# Altium PCB WallMote Revision 3.pcbdoc
Units mil, origin at the board's own origin, x right, y up, seen from the top; angles counter-clockwise.
Board outline 5345 x 3965.6 mil, 2 copper layers (Top Layer, Bottom Layer); 46 components, 81 nets, 202 pads, 35 vias.
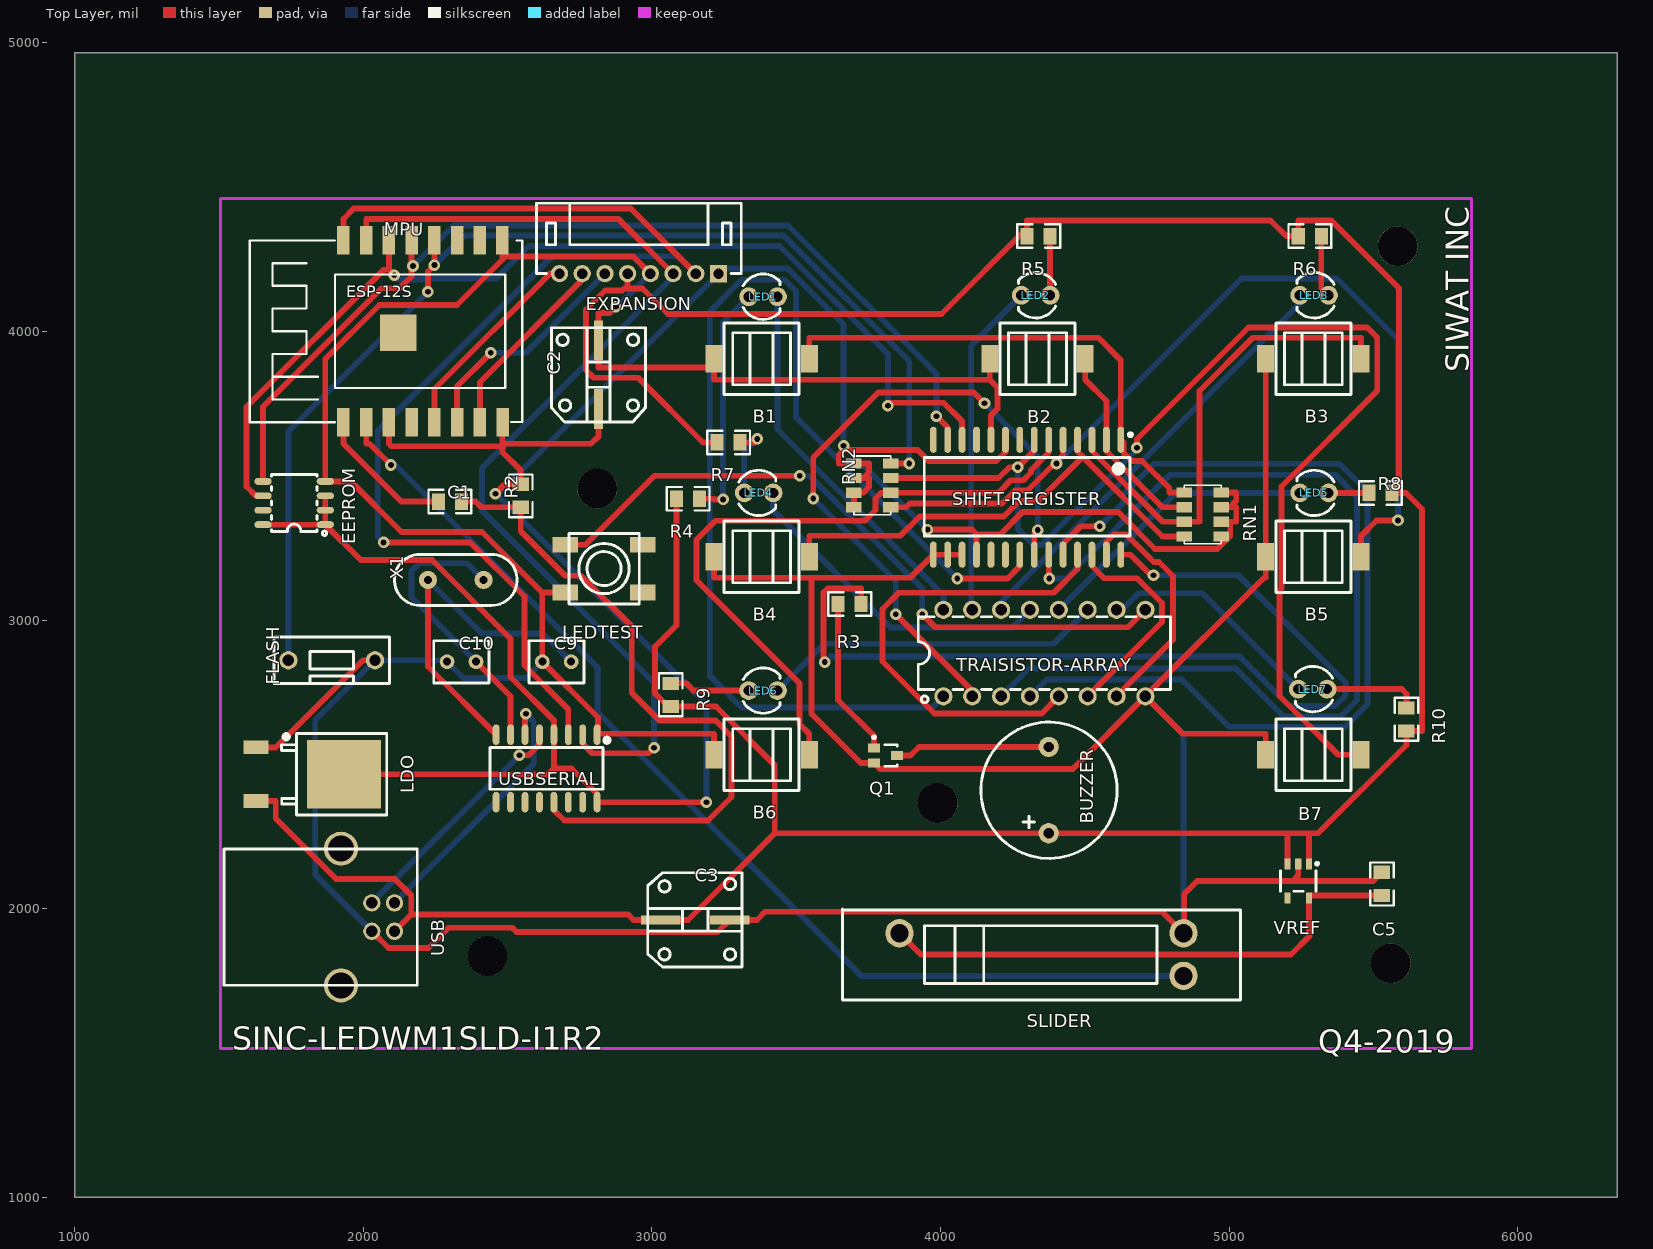
[diagram p0: Top Layer view]
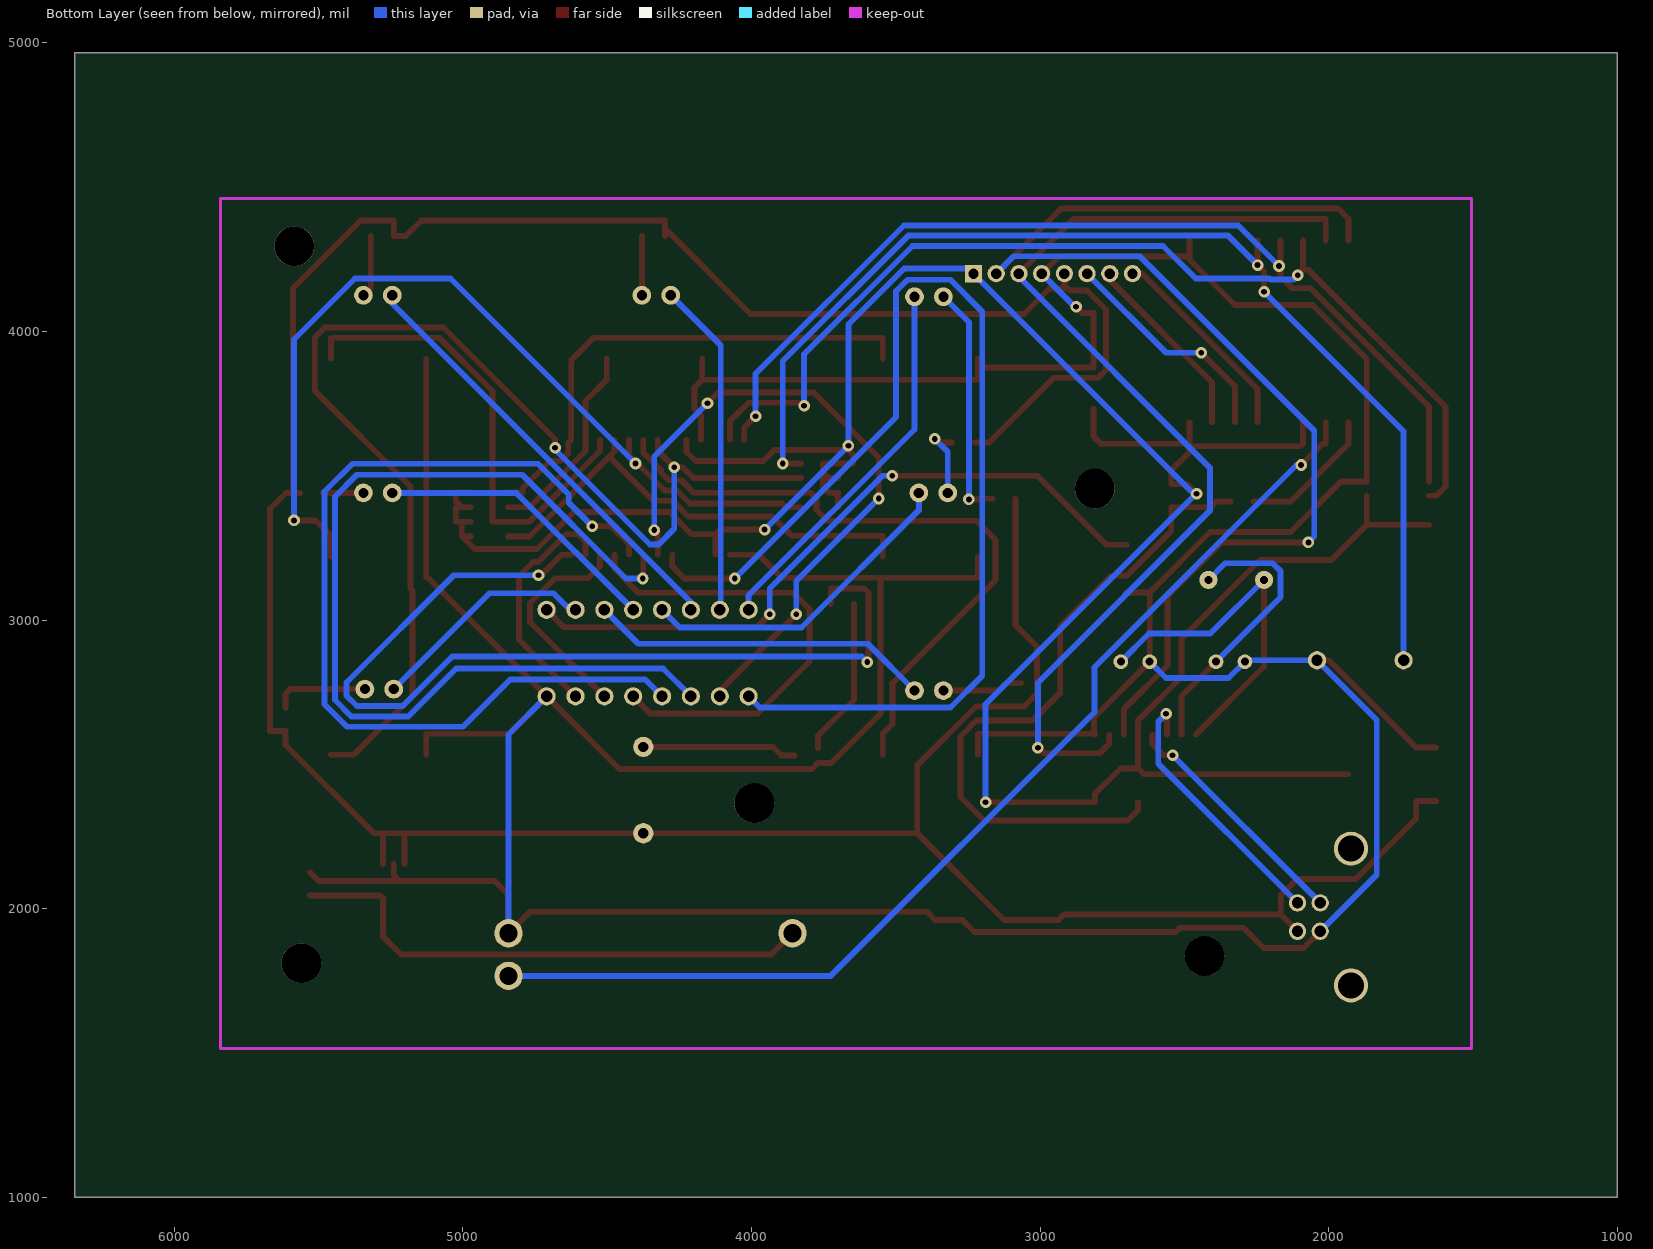
[diagram p1: Bottom Layer view, seen from below]

## Layer stack, top to bottom
Top Layer: signal copper (thickness not stored)
Dielectric: dielectric 12.6, FR-4, Dk 4.8
Bottom Layer: signal copper (thickness not stored)

## Board outline
6345,1000 1000,1000 1000,4965.6 6345,4965.6

## Components (designator, comment, footprint, x,y, rotation, side; value= is the part's Value field where it differs from the comment)
B1 "SKPGABE010" SW-SMD-6.6X6.3X5 3380,3905.6 r0 top
B2 "SKPGABE010" SW-SMD-6.6X6.3X5 4336.25,3905.6 r0 top
B3 "SKPGABE010" SW-SMD-6.6X6.3X5 5292.5,3905.6 r0 top
B4 "SKPGABE010" SW-SMD-6.6X6.3X5 3380,3219.35 r0 top
B5 "SKPGABE010" SW-SMD-6.6X6.3X5 5292.5,3219.35 r0 top
B6 "SKPGABE010" SW-SMD-6.6X6.3X5 3380,2533.1 r0 top
B7 "SKPGABE010" SW-SMD-6.6X6.3X5 5292.5,2533.1 r0 top
BUZZER "TMB12A12" B-12*7.5 4375,2410.6 r90 top
C1 "100nF" 0805 2300,3410.6 r0 top
C2 "10uF" CAP-T-8*7 2815,3850.6 r90 top
C3 "10uF" CAP-T-8*7 3150,1960.6 r0 top
C5 "1uF" 0805 5530,2085.6 r90 top
C9 "22pF" CAP-CT4G-0805-2.54MM 2670,2855.6 r0 top
C10 "22pF" CAP-CT4G-0805-2.54MM 2340,2855.6 r0 top
EEPROM "24LC256T-I/SN SOP-8" SOIC-8_L4.9-W3.9-P1.27-LS6.0-BL 1760,3405.6 r90 top
EXPANSION "X2016WR-08B-N0SN" CONN-TH_8PIN-H-MALE-PITCH2.00-L_X2016WR-08B-N0SN 2955.05,4200.6 r180 top
FLASH "DS-01RP_C319063" DS-01RP 1890,2860.6 r90 top
LDO "LD1117DT33CTR" TO-252-2 1780,2465.6 r270 top
LED1 "TJ-L3FYWGHRMFCSFLC2R-A5" LED-3MM/2.54 3385,4120.6 r90 top
LED2 "TJ-L3FYWGHRMFCSFLC2R-A5" LED-3MM/2.54 4330,4125.6 r270 top
LED3 "TJ-L3FYWGHRMFCSFLC2R-A5" LED-3MM/2.54 5295,4125.6 r270 top
LED4 "TJ-L3FYWGHRMFCSFLC2R-A5" LED-3MM/2.54 3370,3440.6 r90 top
LED5 "TJ-L3FYWGHRMFCSFLC2R-A5" LED-3MM/2.54 5295,3440.6 r270 top
LED6 "TJ-L3FYWGHRMFCSFLC2R-A5" LED-3MM/2.54 3385,2755.6 r90 top
LED7 "TJ-L3FYWGHRMFCSFLC2R-A5" LED-3MM/2.54 5290,2760.6 r270 top
LEDTEST "SKHUBHE010" SW-SMD-6.2X6.3X3.1-4P 2833.86,3178.28 r0 top
MPU "ESP-12S" ESP-12S 2206.49,4000.64 r0 top
Q1 "PMST5551,115" SOT-323-3_L2.2-W1.3-P1.30-LS2.1-BL 3810,2530.6 r180 top
R2 "10K" 0805 2545,3430.6 r90 top
R3 "1K" 0805 3685,3055.6 r180 top
R4 "150" 0805 3125,3420.6 r180 top
R5 "150" 0805 4340,4330.6 r180 top
R6 "150" 0805 5280,4330.6 r180 top
R7 "150" 0805 3265,3615.6 r180 top
R8 "150" 0805 5525,3440.6 r0 top
R9 "150" 0805 3065,2740.6 r270 top
R10 "150" 0805 5615,2655.6 r270 top
RN1 "10K" 1206_X4 4908.9,3365.9 r270 top
RN2 "10K" 1206_X4 3763.9,3466.7 r90 top
SHIFT-REGISTER "MCP23017-E/SO" SOIC-28_300MIL 4300,3425.6 r270 top
SLIDER "ALPS" RES-ADJ-TH_3PIN-V-L35.00-W8.00 4350.03,1840.62 r180 top
TRAISISTOR-ARRAY "ULN2003AIN" PDIP-16_L22.1-W6.3-P2.54-LS7.6-BL 4360,2885.6 r0 top
USB "670688000" USB-B-4P-DIP-12.0X17.0-H11.0-MOLEX 2014.99,1970.58 r270 top
USBSERIAL "CH340G" SOIC-16_150MIL 2635,2485.6 r180 top
VREF "TLV71210DBVR" SOT-23-5_L3.0-W1.7-P0.95-LS2.8-BL 5240,2095.6 r180 top
X1 "12MHz" OSC-49S-1 2320,3139.14 r90 top

## Footprints (in the part's own frame and the unit in brackets; to place one, negate y for a bottom-side part, rotate by r counter-clockwise, add the part's x,y. Pads: shape width x height; smd on the part's side, far side on the other; paste and mask are expansions set on the pad)
0805 [mm]
  rect 1.16x1.45 smd: 1(-1.016,0) 2(1.016,0)
  silkscreen extent -1.9,-1.03 1.87,1.04
1206_X4 [mm]
  rect 0.9x1.375 smd: 1(-1.933,-1.623) 2(-0.643,-1.623) 3(0.643,-1.623) 4(1.933,-1.623) 5(1.933,1.623) 6(0.643,1.623) 7(-0.643,1.623) 8(-1.933,1.623)
  silkscreen extent -2.58,-1.62 2.58,1.62
B-12*7.5 [mil]
  round 70 hole 35.4: 1(-149.6,0) 2(149.6,0)
  silkscreen extent -237,-237 236,235
CAP-CT4G-0805-2.54MM [mm]
  round 1.3 hole 0.7: 1(-1.27,0) 2(1.27,0)
  silkscreen extent -2.44,-1.87 2.41,1.84
CAP-T-8*7 [mm]
  rect 3.5x0.8 smd: 1(-3.028,-0.005) 2(3.028,0.005)
  silkscreen extent -4.18,-4.14 4.13,4.16
CONN-TH_8PIN-H-MALE-PITCH2.00-L_X2016WR-08B-N0SN [mil]
  rect 60x60 hole 36: 1(-275.59,0)
  round 60 hole 36: 2(-196.85,0) 3(-118.11,0) 4(-39.37,0) 5(39.37,0) 6(118.11,0) 7(196.85,0) 8(275.59,0)
  silkscreen extent -354,-244 355,0
DS-01RP [mm]
  round 1.6 hole 1: 1(0,-3.81) 2(0,3.81)
  silkscreen extent -2.03,-5.08 2.03,5.08
ESP-12S [mm]
  rect 1.1x2.5 smd: 1(-7.002,-8.002) 2(-4.991,-8.002) 3(-2.998,-8) 4(-0.989,-8.001) 5(1.006,-8.002) 6(3.002,-8.001) 7(5.006,-8.002) 8(7.002,-8.001) 9(6.996,8) 10(4.998,8) 11(2.998,8.001) 12(0.998,8) 13(-1.004,8.001) 14(-3.004,8.002) 15(-5.002,8) 16(-7.002,8)
  rect 3.2x3.2 smd: 17(-2.176,-0.128)
  silkscreen extent -15.25,-8 8.75,8
LED-3MM/2.54 [mil]
  round 65 hole 35.43: 1(0,50) 2(0,-50)
  silkscreen extent -79,-59 79,69
OSC-49S-1 [mm]
  round 1.6 hole 0.7: 1(0,2.45) 2(0,-2.45)
  silkscreen extent -2.25,-5.39 2.25,5.39
PDIP-16_L22.1-W6.3-P2.54-LS7.6-BL [mm]
  round 1.6 hole 1: 1(-8.89,-3.81) 2(-6.35,-3.81) 3(-3.81,-3.81) 4(-1.27,-3.81) 5(1.27,-3.81) 6(3.81,-3.81) 7(6.35,-3.81) 8(8.89,-3.81) 9(8.89,3.81) 10(6.35,3.81) 11(3.81,3.81) 12(1.27,3.81) 13(-1.27,3.81) 14(-3.81,3.81) 15(-6.35,3.81) 16(-8.89,3.81)
  silkscreen extent -11.1,-4.38 11.1,3.2
RES-ADJ-TH_3PIN-V-L35.00-W8.00 [mm]
  round 2.5 hole 1.6: 1(-12.5,-1.875) 2(-12.5,1.875) 3(12.5,-1.875)
  silkscreen extent -17.53,-4 17.53,4
SOIC-8_L4.9-W3.9-P1.27-LS6.0-BL [mm]
  oval 0.6x1.52 smd: 1(-1.905,-2.74) 2(-0.635,-2.74) 3(0.635,-2.74) 4(1.905,-2.74) 5(1.905,2.74) 6(0.635,2.74) 7(-0.635,2.74) 8(-1.905,2.74)
  silkscreen extent -2.86,-2.86 2.5,2
SOIC-16_150MIL [mm]
  oval 0.6x1.8 smd: 1(-4.445,-2.972) 2(-3.175,-2.972) 3(-1.905,-2.972) 4(-0.635,-2.972) 5(0.635,-2.972) 6(1.905,-2.972) 7(3.175,-2.972) 8(4.445,-2.972) 9(4.445,2.972) 10(3.175,2.972) 11(1.905,2.972) 12(0.635,2.972) 13(-0.635,2.972) 14(-1.905,2.972) 15(-3.175,2.972) 16(-4.445,2.972)
  silkscreen extent -5.51,-2.69 4.98,1.83
SOIC-28_300MIL [mm]
  oval 2.3x0.6 smd: 1(-5.057,8.255) 2(-5.057,6.985) 3(-5.057,5.715) 4(-5.057,4.445) 5(-5.057,3.175) 6(-5.057,1.905) 7(-5.057,0.635) 8(-5.057,-0.635) 9(-5.057,-1.905) 10(-5.057,-3.175) 11(-5.057,-4.445) 12(-5.057,-5.715) 13(-5.057,-6.985) 14(-5.057,-8.255) 15(5.058,-8.255) 16(5.058,-6.985) 17(5.058,-5.715) 18(5.058,-4.445) 19(5.058,-3.175) 20(5.058,-1.905) 21(5.058,-0.635) 22(5.058,0.635) 23(5.058,1.905) 24(5.058,3.175) 25(5.058,4.445) 26(5.058,5.715) 27(5.058,6.985) 28(5.058,8.255)
  silkscreen extent -5.66,-9.05 3.42,9.25
SOT-23-5_L3.0-W1.7-P0.95-LS2.8-BL [mm]
  rect 0.55x1 smd: 1(-0.95,-1.5) 2(0,-1.5) 3(0.95,-1.5) 4(0.95,1.5) 5(-0.95,1.5)
  silkscreen extent -1.78,-1.65 1.55,0.9
SOT-323-3_L2.2-W1.3-P1.30-LS2.1-BL [mil]
  rect 41.5x32.5 smd: 1(40,-26) 2(40,26) 3(-40,0)
  silkscreen extent -40,-68 45,37
SW-SMD-6.2X6.3X3.1-4P [mm]
  rect 2.25x1.4 smd: 1(-3.4,2.1) 2(3.4,2.1) 3(-3.4,-2.1) 4(3.4,-2.1)
  silkscreen extent -3.1,-3.1 3.1,3.1
SW-SMD-6.6X6.3X5 [mm]
  rect 1.5x2.4 smd: 1(-4.2,0) 2(4.2,0)
  silkscreen extent -3.3,-3.15 3.3,3.15
TO-252-2 [mm]
  rect 1.2x2.2 smd: 1(-2.362,-3.876) 3(2.362,-3.871)
  rect 6x6.5 smd: 4(0,3.876)
  silkscreen extent -3.57,-1.61 3.57,7.64
USB-B-4P-DIP-12.0X17.0-H11.0-MOLEX [mm]
  round 1.524 hole 1: 1(1.25,2.355) 2(-1.25,2.355) 3(-1.25,0.355) 4(1.25,0.355)
  round 3 hole 2.3: 5(6.02,-2.355) 6(-6.02,-2.355)
  silkscreen extent -6,-12.64 6,4.35

## Free pads (board coordinates)
  round 137.8 hole 137.8 unplated: ""(2430,1835.6) ""(2810,3455.6) ""(3990,2365.6) ""(5560,1810.6) ""(5585,4295.6)

## Via types
v1: diameter 40.16, hole 20.08, Top Layer to Bottom Layer, 35 vias

## Nets (pads, with @x,y where several pads share a name; then routed paths per layer and width w, separated by ;. In a path a pad name is that pad's centre, name@x,y a point inside that pad or via, vN(x,y) a via of type N, cw(c..) or ccw(c..) an arc to the next point about the centre after c; other vN are vias at no path point)
1V: C5.1 SLIDER.3 VREF.5 | length 1868
  Top Layer w20.08: SLIDER.3 3931.74,1840.6 5215,1840.6 5280,1905.6 5277.4,1908.2 VREF.5 5286.45,2045.6 C5.1
3.3V: C2.1 EEPROM.1 EEPROM.2 EEPROM.3 EEPROM.8 EXPANSION.1 LDO.4 MPU.3 MPU.8 R2.2 RN1.5 RN1.6 RN1.7 RN1.8 RN2.5 RN2.6 RN2.7 RN2.8 SHIFT-REGISTER.9 SHIFT-REGISTER.18 USBSERIAL.4 USBSERIAL.16 | length 10667.2
  Top Layer w20.08: EEPROM.8 EEPROM.1 ; EEPROM.3 EEPROM.2 EEPROM.1 ; LDO.4 2640,2465.6 2660,2485.6 ; MPU.3@2088.5,3685.7 2088.5,3611 2097.3,3602.2 2482.2,3602.2 ; v1(2457.5,3437.9) 2490.2,3470.6 R2.2 2545,3518.9 2482.2,3581.7 2482.2,3602.2 ; MPU.8 2482.2,3611 ; C2.1 2815.2,3637 2789.1,3611 2482.2,3611 ; v1(3188.7,2368.6) USBSERIAL.16 2810,2397.1 2721.5,2485.6 2660,2485.6 ; v1(3664.1,3603.8) 3664.2,3603.6 v1@3664.2,3589 ; RN2.8 3700,3428.3 RN2.7@3713.1,3441.4 ; RN2.7 RN2.7@3713.1,3441.4 ; RN2.6 3713.1,3492 3726.3,3492 3731.8,3492 ; v1(3954.5,3313.4) 4108.9,3313.4 4125,3297.2 ; SHIFT-REGISTER.18 4125,3297.2 ; SHIFT-REGISTER.9 4225,3582.8 4193.6,3551.4 3959.1,3551.4 3921.5,3589 v1@3664.2,3589 ; RN1.5 5002.3,3289.8 ; RN1.6 4999.1,3340.6 5004.6,3340.6 ; RN1.7 5003.1,3391.2 ; RN1.8 5025.3,3442 5025.3,3413.4 5003.1,3391.2 ; EEPROM.1 1990.6,3207.9 2237.3,3207.9 2510,2935.2 2510,2802.6 2660,2652.6 USBSERIAL.4 2660,2485.6 ; 2482.2,3602.2 2482.2,3611 ; v1@3664.2,3589 3647.5,3572.2 3647.5,3542.8 RN2.5 3752.5,3542.8 3752.5,3512.7 3731.8,3492 ; RN2.7@3713.1,3441.4 3726.3,3441.4 3732,3441.4 3752.5,3461.9 3752.5,3492 3731.8,3492 ; 4125,3297.2 4207.6,3297.2 4285.2,3374.9 4615.2,3374.9 4743.5,3246.6 4959.1,3246.6 5002.3,3289.8 ; 5002.3,3289.8 5004.6,3292.1 5004.6,3340.6 ; 5003.1,3391.2 5025.3,3391.2 5025.3,3340.6 5004.6,3340.6
  Bottom Layer w20.08: v1(2457.5,3437.9) 2461.9,3433.6 v1@2463.6,3433.6 ; v1(3188.7,2368.6) 3188.7,2708.4 v1@2463.6,3433.6 ; v1(3954.5,3313.4) v1(3664.1,3603.8) 3664.1,4024.9 3470.3,4218.6 3248.6,4218.6 EXPANSION.1 v1@2463.6,3433.6
5V: BUZZER.1 C3.1 EXPANSION.5 LDO.3 R4.2 R5.2 R6.2 R7.2 R8.2 R9.2 R10.2 USB.1 VREF.1 VREF.3 | length 12000
  Top Layer w20.08: LDO.3 1696.4,2372.6 1696.4,2312.4 1905.9,2102.9 2108.5,2102.9 2165.5,2045.9 2165.5,1979.2 ; USB.1 2165.5,1979.2 ; EXPANSION.5@2915.6,4200.6 2915.6,4149.3 ; R4.2 3085,3393.6 3085,3366.6 3085,2982.1 3011,2908.1 3011,2745.1 3055.5,2700.6 R9.2 3221.7,2700.6 3425.8,2496.6 3425.8,2261 ; R7.2 3176.7,3615.6 2952.4,3839.9 2798,3839.9 2771.2,3866.7 2771.2,4076.4 2837,4142.2 2896.9,4142.2 2903.9,4149.3 2915.6,4149.3 ; R5.2 R5.2@4300,4357.6 ; VREF.3 5202.6,2261 ; VREF.1 5277.4,2261 ; R8.2 5589.2,3440.6 ; 2165.5,1979.2 2917.7,1979.2 2936.4,1960.4 C3.1 3078,1960.4 3125.2,1960.4 3425.8,2261 ; 2915.6,4149.3 2967,4149.3 3055.3,4060.9 4003.3,4060.9 R5.2@4300,4357.6 ; 3425.8,2261 BUZZER.1 5308.7,2261 5615,2567.3 R10.2 5669,2615.6 5669,3384.9 5613.3,3440.6 5589.2,3440.6 ; R5.2@4300,4357.6 4300,4384.6 5144.2,4384.6 5198.3,4330.6 R6.2 5240,4384.6 5354.7,4384.6 5589.2,4150.1 5589.2,3440.6
BTN1: B1.2 RN1.1 SHIFT-REGISTER.1 | length 1786.1
  Top Layer w20.08: B1.2 3545.4,3978.3 4547.2,3978.3 4625,3900.5 SHIFT-REGISTER.1 4635.3,3614.4 4635.3,3578.2 4662,3551.5 4698.2,3551.5 4792.5,3457.2 4792.5,3442 RN1.1
BTN2: B2.2 RN1.2 SHIFT-REGISTER.2 | length 700.7
  Top Layer w20.08: B2.2 4501.6,3832.9 4575,3759.5 SHIFT-REGISTER.2 4575,3586 4769.8,3391.2 RN1.2
BTN3: B3.2 RN1.3 SHIFT-REGISTER.3 | length 1675.6
  Top Layer w20.08: SHIFT-REGISTER.3 4525,3585.8 4770.2,3340.6 RN1.3 4897.5,3340.6 4897.5,3793.7 5082.1,3978.3 5457.9,3978.3 B3.2@5457.9,3905.6
BTN4: B4.2 RN1.4 SHIFT-REGISTER.4 | length 1666.4
  Top Layer w20.08: B4.2@3545.4,3219.3 3545.4,3292.1 3860.9,3292.1 3927.8,3358.9 4219,3358.9 4273.2,3413.2 4340.1,3413.2 4493.1,3566.2 ; SHIFT-REGISTER.4 4475,3584.4 4493.1,3566.2 ; RN1.4 4792.5,3289.8 4769.6,3289.8 4493.1,3566.2
BTN5: B5.2 RN2.1 SHIFT-REGISTER.5 | length 3115.8
  Top Layer w20.08: RN2.1 3880.3,3390.6 3893.6,3403.8 4213.6,3403.8 4258.5,3448.7 4301.6,3448.7 v1@4398.7,3545.9 ; v1(4402,3542.6) v1@4398.7,3545.9 ; SHIFT-REGISTER.5 4425,3572.1 v1@4398.7,3545.9 ; B5.2@5457.9,3219.3 5457.9,3292.1 5511.1,3345.2 v1(5585.6,3345.2)
  Bottom Layer w20.08: v1(4402,3542.6) 5043.2,4183.8 5373.8,4183.8 5585.6,3972 v1(5585.6,3345.2)
BTN6: B6.2 RN2.2 SHIFT-REGISTER.6 | length 2325.2
  Top Layer w20.08: B6.2 3545.4,2605.8 3511.7,2639.5 3511.7,2780.7 3154.4,3137.9 3154.4,3278.1 3220.3,3344 3737.4,3344 3774.7,3381.3 3774.7,3421.5 3794.6,3441.4 RN2.2 4201,3441.4 4243.8,3484.2 4286.6,3484.2 4313.3,3510.9 4313.3,3519 4375,3580.7 SHIFT-REGISTER.6
BTN7: B7.2 RN2.3 SHIFT-REGISTER.7 | length 4154.2
  Top Layer w20.08: RN2.3 4201.3,3492 4239.1,3529.8 v1(4267.8,3529.8) 4325,3587 SHIFT-REGISTER.7 ; v1(4680.8,3597.1) 4680.8,3627.6 5067.1,4013.8 5479.4,4013.8 5514,3979.2 5514,3794.5 5182.1,3462.6 5182.1,3109.6 5174.6,3102 5174.6,2736.8 5378.3,2533.1 B7.2@5457.9,2533.1
  Bottom Layer w20.08: v1(4267.8,3529.8) 4267.8,3316.2 4321.8,3262.2 4352.1,3262.2 4680.8,3590.9 v1(4680.8,3597.1)
BUZZER: R3.1 SHIFT-REGISTER.28 | length 3339.3
  Top Layer w20.08: v1(3598.9,2854.4) 3594.8,2858.5 3594.8,3095 3609.4,3109.6 3725,3109.6 R3.1 ; SHIFT-REGISTER.28 4658.7,3226.5 4729.9,3155.3 v1(4738.3,3155.3)
  Bottom Layer w20.08: v1(3598.9,2854.4) 3618.1,2873.5 5037,2873.5 5208.7,2701.8 5367.7,2701.8 5403.9,2738 5403.9,2783.3 5031.9,3155.3 v1(4738.3,3155.3)
BUZZER_2: BUZZER.2 Q1.3 | length 537.3
  Top Layer w20.08: Q1.3 3896.2,2530.6 3925.8,2560.2 BUZZER.2
GND: B1.1 B2.1 B3.1 B4.1 B5.1 B6.1 B7.1 C2.2 C3.2 C5.2 C9.1 C10.1 EEPROM.4 EEPROM.7 EXPANSION.4 FLASH.1 LDO.1 LEDTEST.3 MPU.9 Q1.2 SHIFT-REGISTER.10 SHIFT-REGISTER.15 SHIFT-REGISTER.16 SHIFT-REGISTER.17 SLIDER.1 TRAISISTOR-ARRAY.8 USB.4 USBSERIAL.1 VREF.2 | length 17653.1
  Top Layer w20.08: LDO.1 1696.2,2558.6 1998.2,2860.6 FLASH.1 ; USB.4 2086.8,1863.6 2225.1,1863.6 2295.2,1933.7 2515.5,1933.7 2530.5,1918.7 3227.1,1918.7 C3.2 3363.6,1960.8 3391.9,1989.1 4767.4,1989.1 SLIDER.1@4842.1,1914.4 ; MPU.9 2481.9,4249.8 ; LEDTEST.3 2630.2,3095.6 2620,3095.6 ; USBSERIAL.1 USBSERIAL.1@2813.2,2605.8 ; v1(2875,4085.6) 2853.6,4064.2 2814.8,4064.2 C2.2 2814.8,3875.4 B1.1@3214.7,3875.4 ; EXPANSION.4 2935.4,4259.6 2491.7,4259.6 2481.9,4249.8 ; B6.1@3214.7,2533.1 3214.7,2605.8 USBSERIAL.1@2813.2,2605.8 ; B4.1@3214.7,3219.3 3214.7,3146.6 3552.7,3146.6 ; B1.1@3214.7,3905.6 B1.1@3214.7,3875.4 ; SHIFT-REGISTER.17 SHIFT-REGISTER.16 SHIFT-REGISTER.15 3895.2,3146.6 3552.7,3146.6 ; B2.1 4170.9,3832.9 ; SHIFT-REGISTER.10 4175,3709.6 4197.9,3732.5 4197.9,3805.9 4170.9,3832.9 ; SLIDER.1 4845,1917.29 4845,2050.6 4890,2095.6 5220,2095.6 ; B7.1 5127.2,2605.8 4839.8,2605.8 TRAISISTOR-ARRAY.8 ; B3.1 5127.2,3219.3 5127.2,3183 5127.2,3146.6 5121,3146.6 TRAISISTOR-ARRAY.8 ; VREF.2 5240,2115.6 5220,2095.6 ; C5.2 5500,2095.6 5220,2095.6 ; 2481.9,4249.8 2324.4,4092.3 2055.4,4092.3 1867.9,3904.7 EEPROM.4 1956.3,3480.6 2132.2,3304.7 2410.9,3304.7 2620,3095.6 ; 2620,3095.6 C9.1 2813.2,2662.4 USBSERIAL.1@2813.2,2605.8 ; B1.1@3214.7,3875.4 3214.7,3869.2 3214.7,3832.9 4170.9,3832.9 ; 3552.7,3146.6 3552.7,2675.6 3723.8,2504.6 Q1.2 3790.7,2483.9 4458.4,2483.9 TRAISISTOR-ARRAY.8
  Bottom Layer w20.08: USB.4 1833.2,2117.1 1833.2,2653.8 FLASH.1 2285,2860.6 C10.1 2346.5,2799.1 2563.6,2799.1 C9.1 ; v1(2875,4085.6) 2879.4,4085.6 EXPANSION.4 ; TRAISISTOR-ARRAY.8 4842.1,2603.5 SLIDER.1@4842.1,1914.4
GPIO0: FLASH.2 MPU.12 RN2.4 | length 3952.3
  Top Layer w20.08: v1(2223.4,4137.8) 2223.4,4207.6 v1(2245.8,4230) MPU.12 ; RN2.4 3880.3,3542.8 3880.5,3542.6 v1(3892,3542.6)
  Bottom Layer w20.08: FLASH.2 1740,3654.4 v1(2223.4,4137.8) ; v1(2245.8,4230) 2348.1,4332.3 3457.1,4332.3 3892,3897.4 v1(3892,3542.6)
GPIO12: EXPANSION.6 MPU.6 | length 798.3
  Top Layer w20.08: MPU.6 2324.7,3760.3 2324.7,3809.9 v1(2441,3926.2)
  Bottom Layer w20.08: v1(2441,3926.2) 2562.5,3926.2 EXPANSION.6
GPIO13: EXPANSION.7 MPU.7 | length 661.9
  Top Layer w20.08: MPU.7 2403.6,3824.4 2758.2,4179 EXPANSION.7
GPIO14: EXPANSION.8 MPU.5 | length 713.9
  Top Layer w20.08: MPU.5 2246.1,3800.4 2646.3,4200.6 EXPANSION.8@2679.4,4200.6
LED1: SHIFT-REGISTER.21 TRAISISTOR-ARRAY.1 | length 3996
  Top Layer w20.08: v1(4058.4,3143.9) 4232.7,3143.9 4275,3186.2 SHIFT-REGISTER.21
  Bottom Layer w20.08: TRAISISTOR-ARRAY.1 3971.2,2696.8 3310.5,2696.8 3200.2,2807.1 3200.2,4068.7 3310.5,4179.1 3459.6,4179.1 3498.7,4140 3498.7,3703.6 v1(4058.4,3143.9)
LED1_1: LED1.1 R4.1 | length 821.5
  Top Layer w20.08: R4.1 3213.3,3420.6 3215.8,3418.2 v1(3246.4,3418.2)
  Bottom Layer w20.08: v1(3246.4,3418.2) 3246.4,4032 LED1.1
LED2: SHIFT-REGISTER.22 TRAISISTOR-ARRAY.2 | length 2364.3
  Top Layer w20.08: v1(3559.2,3421.3) 3559.2,3563.3 3785,3789.1 4114.7,3789.1 v1(4152.4,3751.4) ; v1(3845.2,3019.9) 4110,2755.1 TRAISISTOR-ARRAY.2 ; SHIFT-REGISTER.22 4325,3300 v1(4336.8,3311.8)
  Bottom Layer w20.08: v1(3559.2,3421.3) 3845.2,3135.2 v1(3845.2,3019.9) ; v1(4152.4,3751.4) 4336.8,3567 v1(4336.8,3311.8)
LED2_1: LED2.1 R5.1 | length 205
  Top Layer w20.08: LED2.1 R5.1
LED3: SHIFT-REGISTER.23 TRAISISTOR-ARRAY.3 | length 3401.8
  Top Layer w20.08: SHIFT-REGISTER.23 4375,3146.2 v1(4377.2,3144)
  Bottom Layer w20.08: TRAISISTOR-ARRAY.3 4306.8,2832.4 5023.4,2832.4 5189.7,2666 5387.3,2666 5443.8,2722.5 5443.8,3427.6 5367.9,3503.6 4794.6,3503.6 4435,3144 v1(4377.2,3144)
LED3_1: LED3.1 R6.1 | length 215.4
  Top Layer w20.08: R6.1 5320,4150.6 LED3.1
LED4: SHIFT-REGISTER.24 TRAISISTOR-ARRAY.4 | length 3293.9
  Top Layer w20.08: SHIFT-REGISTER.24 4425,3263.5 4486.5,3325 v1(4551.6,3325)
  Bottom Layer w20.08: TRAISISTOR-ARRAY.4 4368.3,2793.9 4836.1,2793.9 4999.5,2630.5 5402,2630.5 5479.6,2708 5479.6,3445.2 5383.3,3541.5 4739.9,3541.5 4633.1,3434.7 4633.1,3406.5 v1(4551.6,3325)
LED4_1: LED4.1 R7.1 | length 270.7
  Top Layer w20.08: R7.1 3353.3,3615.6 3353.3,3616.4 v1(3364.6,3627.7)
  Bottom Layer w20.08: LED4.1 3320,3583.1 v1(3364.6,3627.7)
LED5: SHIFT-REGISTER.25 TRAISISTOR-ARRAY.5 | length 1674.8
  Top Layer w20.08: TRAISISTOR-ARRAY.5 4350.6,2676.2 3979.4,2676.2 3799.4,2856.2 3799.4,3038.5 3855.2,3094.3 4392.8,3094.3 4475,3176.6 SHIFT-REGISTER.25
LED5_1: LED5.1 R8.1 | length 140
  Top Layer w20.08: LED5.1 R8.1
LED6: SHIFT-REGISTER.26 TRAISISTOR-ARRAY.6 | length 764.9
  Top Layer w20.08: TRAISISTOR-ARRAY.6 4767.5,2993.1 4767.5,3058.7 4681.3,3145 4567,3145 4525,3187 SHIFT-REGISTER.26
LED6_1: LED6.1 R9.1 | length 280.4
  Top Layer w20.08: R9.1 3119,2780.6 3144,2755.6 LED6.1
LED7: SHIFT-REGISTER.27 TRAISISTOR-ARRAY.7 | length 843.8
  Top Layer w20.08: SHIFT-REGISTER.27 4575,3270.9 4601.4,3297.2 4642.6,3297.2 4738.9,3200.8 4757.1,3200.8 4805.8,3152.2 4805.8,2931.4 TRAISISTOR-ARRAY.7
LED7_1: LED7.1 R10.1 | length 330.2
  Top Layer w20.08: LED7.1 5598.3,2760.6 5615,2743.9 R10.1
LEDP1: LED1.2 TRAISISTOR-ARRAY.16 | length 1323.2
  Bottom Layer w20.08: LED1.2 3435,3660.8 4010,3085.8 TRAISISTOR-ARRAY.16
LEDP2: LED2.2 TRAISISTOR-ARRAY.15 | length 1163.1
  Bottom Layer w20.08: TRAISISTOR-ARRAY.15 4106.8,3038.8 4106.8,3952.4 LED2.2
LEDP3: LED3.2 TRAISISTOR-ARRAY.14 | length 1518.7
  Bottom Layer w20.08: TRAISISTOR-ARRAY.14 4210,3061.9 4624.7,3476.6 5245,4096.8 LED3.2
LEDP4: LED4.2 TRAISISTOR-ARRAY.13 | length 1143.7
  Bottom Layer w20.08: LED4.2 3420,3380.6 3826.3,2974.3 4248.7,2974.3 TRAISISTOR-ARRAY.13
LEDP5: LED5.2 TRAISISTOR-ARRAY.12 | length 1002.8
  Bottom Layer w20.08: TRAISISTOR-ARRAY.12 4815,3440.6 LED5.2
LEDP6: LED6.2 TRAISISTOR-ARRAY.11 | length 1191
  Bottom Layer w20.08: LED6.2 3597.2,2917.8 4392.2,2917.8 TRAISISTOR-ARRAY.11
LEDP7: LED7.2 TRAISISTOR-ARRAY.10 | length 791.2
  Bottom Layer w20.08: TRAISISTOR-ARRAY.10 4629.5,3035.6 4686.4,3092.6 4908,3092.6 LED7.2
LEDTEST_2: LEDTEST.2
LEDTEST_4: LEDTEST.4
MPU_4: MPU.4
MPU_10: MPU.10
MPU_11: MPU.11
MPU_17: MPU.17
Q1_1: Q1.1 R3.2 | length 550.8
  Top Layer w20.08: R3.2 3645,2723.3 3770,2598.3 Q1.1
RST: C1.1 MPU.1 | length 486.9
  Top Layer w20.08: MPU.1 1930.8,3610.9 2131.1,3410.6 C1.1
RX: EXPANSION.3 MPU.15 USBSERIAL.2 | length 3681.3
  Top Layer w20.08: MPU.15 2009.6,4390.3 2009.6,4390.4 2883.4,4390.4 EXPANSION.3@3073.1,4200.6 ; USBSERIAL.2 2760,2571.2 2793,2538.3 2988.1,2538.3 v1(3007.4,2557.6)
  Bottom Layer w20.08: v1(3007.4,2557.6) 3007.4,2782.9 2411.4,3378.9 2411.4,3527.9 3073.1,4189.6 EXPANSION.3@3073.1,4200.6
S$10: 
S$12: 
S$18: 
S$20: 
S$24: 
S$26: 
S$27: 
S$28: 
S$38: 
S$153: 
SCL: EEPROM.6 MPU.14 SHIFT-REGISTER.12 | length 3618.1
  Top Layer w20.08: EEPROM.6 1626.7,3430.6 1594.9,3462.4 1594.9,3738.9 2070.1,4214 2088.2,4214 ; MPU.14 2088.2,4241 2088.2,4214 ; v1(2106.9,4195.3) 2088.2,4214 ; v1(3817.7,3742.5) 3828.6,3753.4 4010.8,3753.4 4075,3689.2 SHIFT-REGISTER.12
  Bottom Layer w20.08: v1(2106.9,4195.3) 2122.5,4179.8 2201,4179.8 2204.5,4183.4 2460.5,4183.4 2573.9,4296.8 3442.4,4296.8 3817.7,3921.5 v1(3817.7,3742.5)
SDA: EEPROM.5 MPU.13 SHIFT-REGISTER.13 | length 3420.7
  Top Layer w20.08: EEPROM.5 1652.1,3739.2 2062.7,4149.8 2125.8,4149.8 2167,4190.9 v1@2167,4227 ; MPU.13 2167,4241 v1@2167,4227 ; v1(2171.9,4227) v1@2167,4227 ; v1(3985.9,3706.4) 4025,3667.3 SHIFT-REGISTER.13
  Bottom Layer w20.08: v1(2171.9,4227) 2312.8,4367.8 3471.9,4367.8 3985.9,3853.8 v1(3985.9,3706.4)
SHIFT-REGISTER_8: SHIFT-REGISTER.8
SHIFT-REGISTER_11: SHIFT-REGISTER.11
SHIFT-REGISTER_14: SHIFT-REGISTER.14
SHIFT-REGISTER_19: SHIFT-REGISTER.19
SHIFT-REGISTER_20: SHIFT-REGISTER.20
SLIDER: MPU.2 SLIDER.2 | length 3761.8
  Top Layer w20.08: MPU.2 2010,3610.9 2021.4,3610.9 v1(2095.2,3537.2)
  Bottom Layer w20.08: v1(2095.2,3537.2) 2110.7,3537.2 2811.5,2836.3 2811.5,2680.6 3725.4,1766.8 SLIDER.2@4842.1,1766.8
TRAISISTOR-ARRAY_9: LEDTEST.1 TRAISISTOR-ARRAY.9 | length 2403.3
  Top Layer w20.08: LEDTEST.1 2769.8,3261 3008.8,3500 v1(3512.3,3500) ; v1(3936.7,3020.4) 3982,2975.1 4649.5,2975.1 TRAISISTOR-ARRAY.9
  Bottom Layer w20.08: v1(3512.3,3500) 3545.6,3500 3936.7,3108.9 v1(3936.7,3020.4)
TX: EXPANSION.2 MPU.16 USBSERIAL.3 | length 4284.4
  Top Layer w20.08: MPU.16 1930.8,4390.3 1966.4,4425.9 2926.6,4425.9 EXPANSION.2 ; v1(2070,3269.1) 2370.5,3269.1 2558.1,3081.6 2558.1,2842.5 2710,2690.6 USBSERIAL.3
  Bottom Layer w20.08: v1(2070,3269.1) 2049.6,3289.5 2049.6,3655.9 2654.3,4260.6 3091.9,4260.6 EXPANSION.2
UD+: USB.3 USBSERIAL.5 | length 841.9
  Top Layer w20.08: v1(2540.6,2531.4) 2572.1,2531.4 2610,2569.3 USBSERIAL.5
  Bottom Layer w20.08: USB.3 v1(2540.6,2531.4)
UD-: USB.2 USBSERIAL.6 | length 939.9
  Top Layer w20.08: USBSERIAL.6 2560,2671.8 v1(2563.1,2674.9)
  Bottom Layer w20.08: USB.2 2590.3,2502.3 2590.3,2647.7 v1(2563.1,2674.9)
USB_5: USB.5
USB_6: USB.6
USBSERIAL_9: USBSERIAL.9
USBSERIAL_10: USBSERIAL.10
USBSERIAL_11: USBSERIAL.11
USBSERIAL_12: USBSERIAL.12
USBSERIAL_13: C1.2 R2.1 USBSERIAL.13 | length 2357.7
  Top Layer w20.08: C1.2 2388.3,3410.6 2408.3,3390.6 2491,3390.6 R2.1 2545,3308.1 2699.3,3153.8 2754.2,3153.8 2929.8,2978.2 2929.8,2747.7 3025.2,2652.3 3219.8,2652.3 3275.5,2596.6 3275.5,2386.6 3193.8,2304.8 2696.7,2304.8 2660,2341.5 USBSERIAL.13
USBSERIAL_14: USBSERIAL.14
USBSERIAL_15: USBSERIAL.15
VREF_4: VREF.4
XI: C10.2 USBSERIAL.7 X1.2 | length 994.4
  Top Layer w20.08: C10.2 2510,2735.6 USBSERIAL.7
  Bottom Layer w20.08: C10.2 2166.1,3079.5 2166.1,3168.8 2193.9,3196.6 2359,3196.6 X1.2
XO: C9.2 USBSERIAL.8 X1.1 | length 1248.4
  Top Layer w20.08: X1.1 2223.5,2839.1 USBSERIAL.8
  Bottom Layer w20.08: X1.1 2409.8,2952.9 2622.7,2952.9 C9.2

## Silkscreen, mask and mechanical layers (free items; w line width, h text height)
Top Overlay:
  text "SIWAT INC" at 5830.6,3858.4 h80 r90
  text "SINC-LEDWM1SLD-I1R2" at 1545,1510.6 h80
  text "Q4-2019" at 5310,1500 h80

## Text inside footprints (layer, text, board x,y; h text height)
FLASH: Document "1" at 2015,2850.6 h20 r270; Document "ON" at 1805,2830.6 h20 r90